# Altium PCB miaow-foc-board.pcbdoc (part 8 of 10)
Units mil, origin at the board's own origin, x right, y up, seen from the top; angles counter-clockwise.
Board outline 2755.91 x 3149.61 mil, 6 copper layers (SIG1, GND2, SIG3, PWR4, GND5, SIG6), stack 60.566 mil thick; 437 components, 392 nets, 2120 pads, 1697 vias.
Unrouted connection lines stored in the file: 1090.
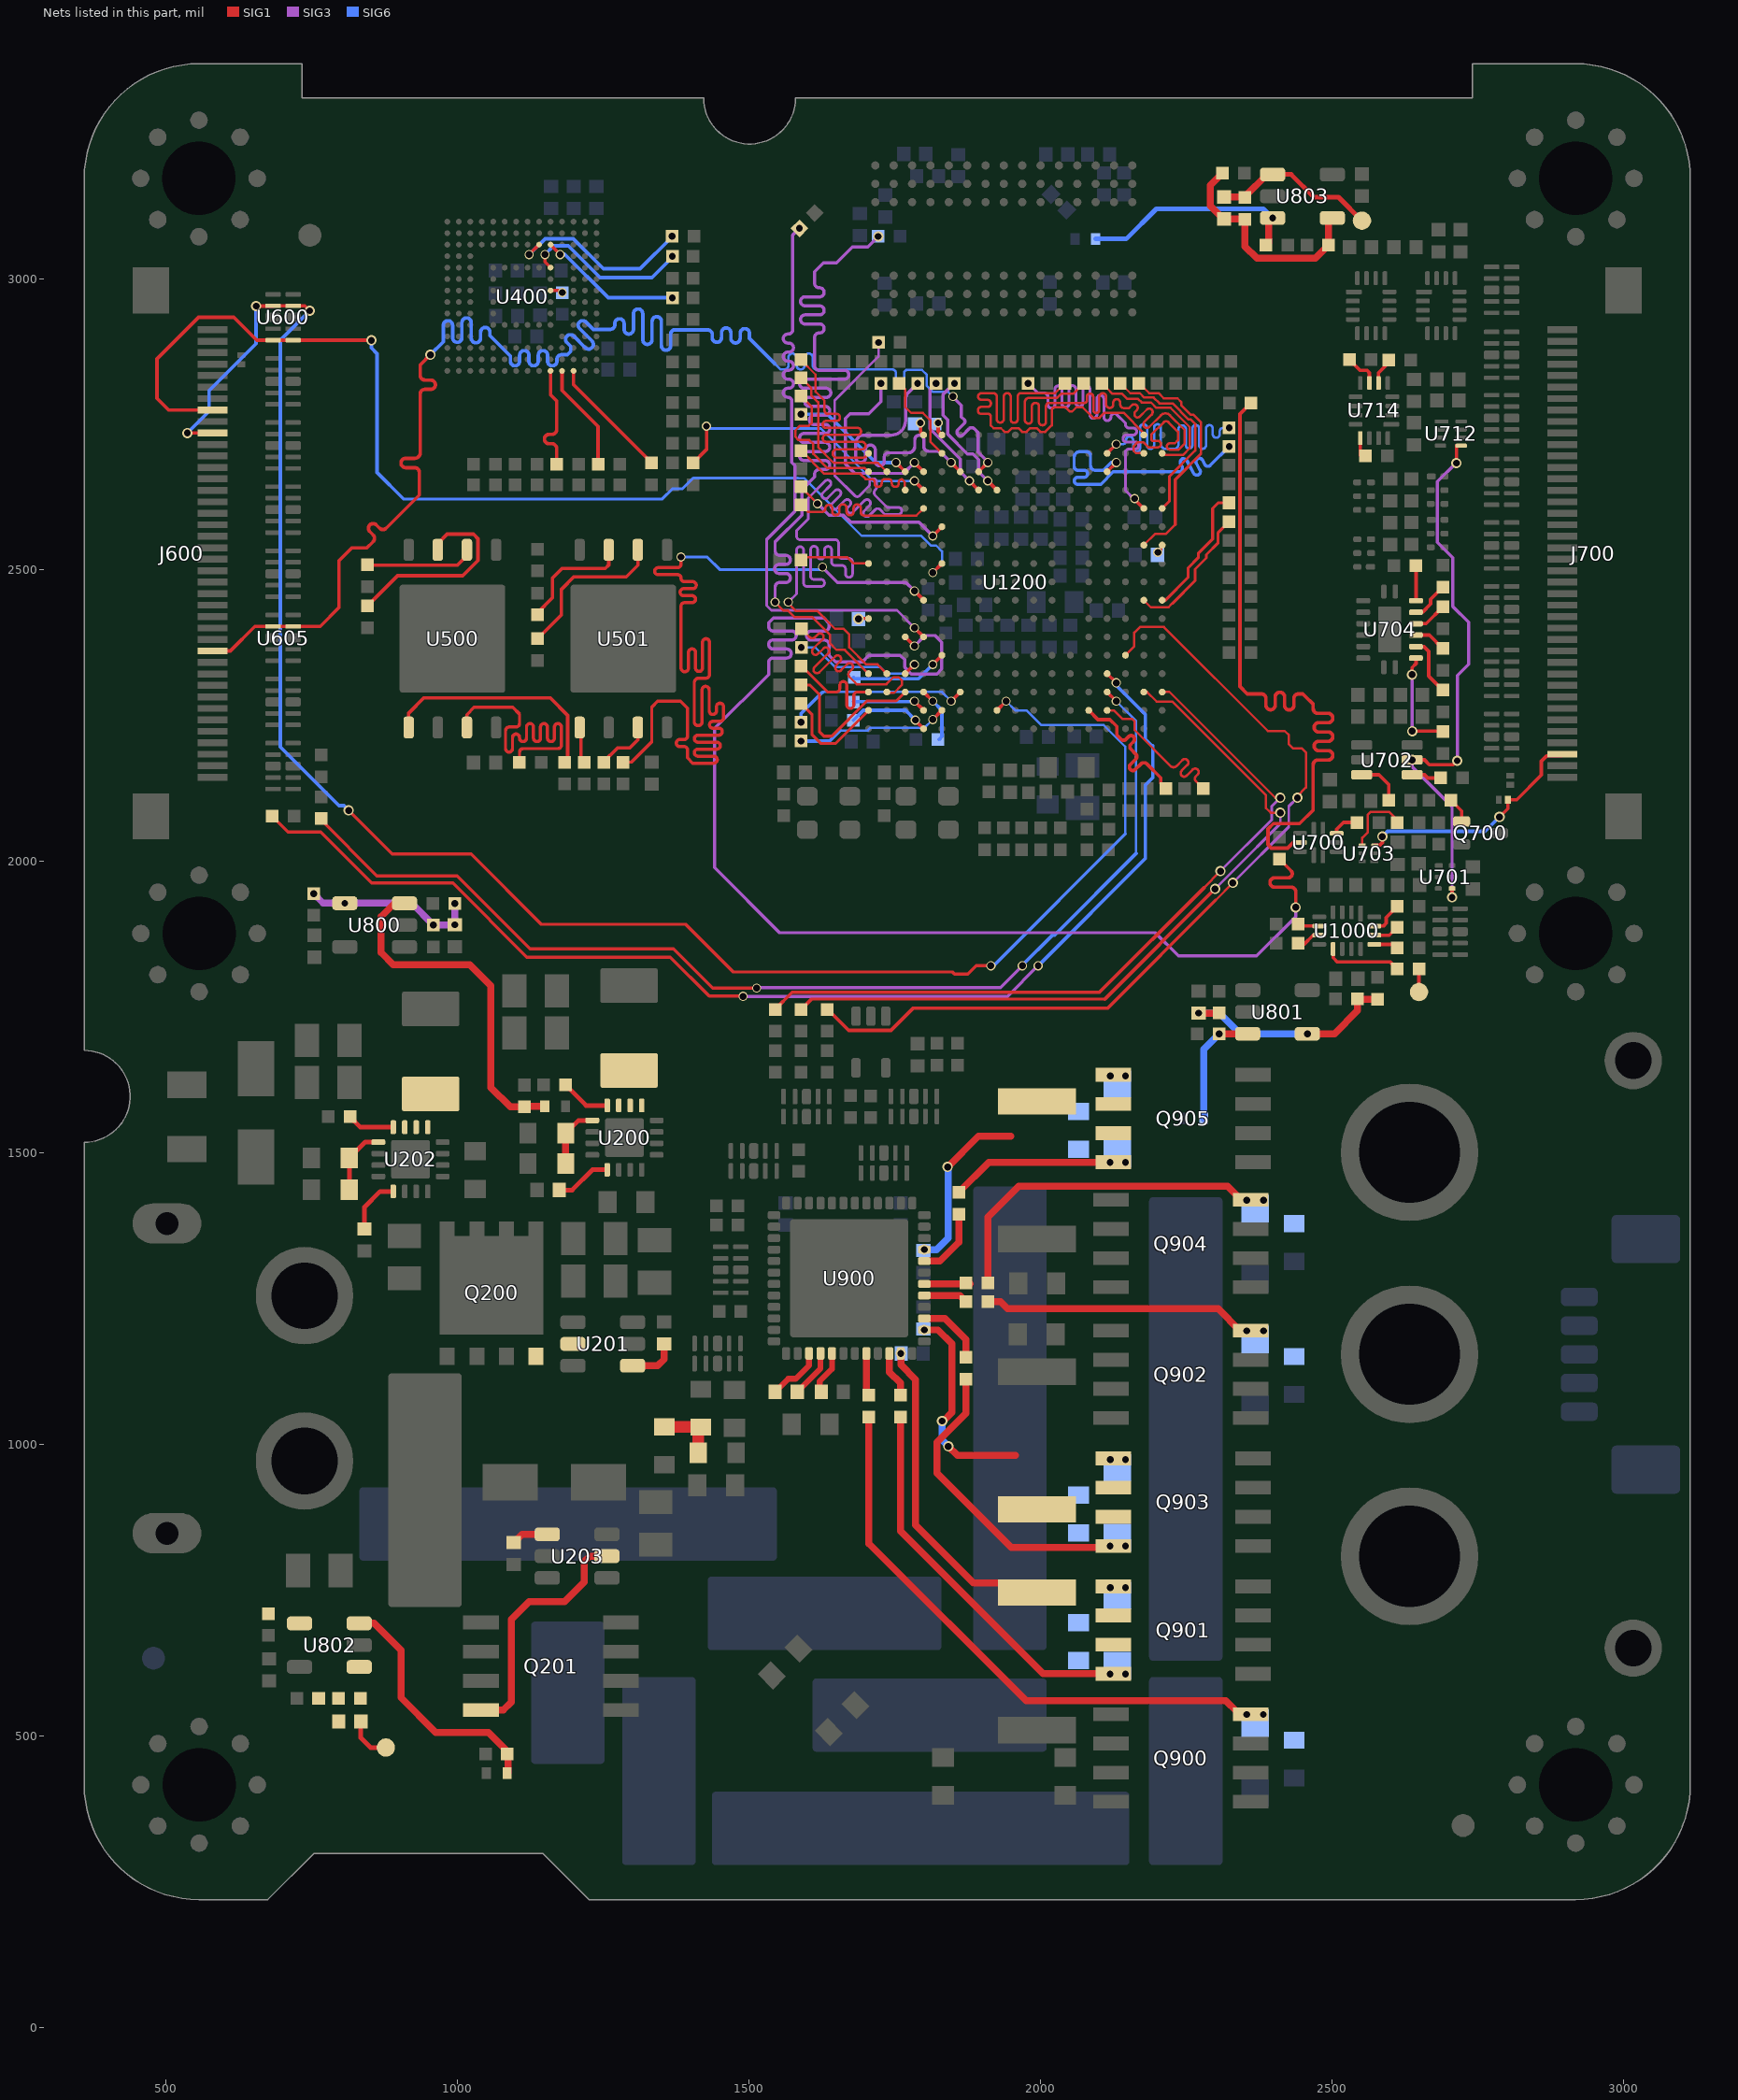
[diagram p11: the nets of this part, all layers, seen from the top]

## Via types
v1: diameter 17.72, hole 11.81, SIG1 to SIG6, tented both sides, 1223 vias
v2: diameter 15.75, hole 11.81, SIG1 to SIG6, tented both sides, 453 vias
v3: diameter 17.72, hole 11.81, SIG1 to SIG6, tented top, 21 vias

## Nets (pads, with @x,y where several pads share a name; then routed paths per layer and width w, separated by ;. In a path a pad name is that pad's centre, name@x,y a point inside that pad or via, vN(x,y) a via of type N, cw(c..) or ccw(c..) an arc to the next point about the centre after c; other vN are vias at no path point) (continued)
LCD_R7: J600.29 U605.2 U605.9 U1200.G15 | length 2909.1
  SIG1 w6: J600.29@579.29,2361.2 609.91,2361.2 652.12,2403.42 U605.2@683.32,2403.42 U605.9@717.77,2403.42 764.26,2403.42 796.24,2435.4 796.24,2515.51 819,2538.27 844.62,2538.27 854.94,2548.59 ccw(c848.96,2554.56) 854.94,2560.54 849.32,2566.16 cw(c854.98,2571.81) 860.63,2577.48 866.25,2571.86 ccw(c871.91,2577.51) 877.56,2571.86 934.37,2628.66 934.37,2667.62 ccw(c926.27,2667.62) 926.27,2675.72 910.97,2675.72 cw(c910.97,2683.72) 910.97,2691.72 926.27,2691.72 ccw(c926.27,2701.45) 936,2701.45 936,2802.22 cw(c943.83,2802.22) 943.83,2810.05 953.92,2810.05 ccw(c953.92,2818.05) 953.92,2826.05 943.83,2826.05 cw(c943.83,2834.05) 935.83,2834.05 935.83,2851.92 v1(953.31,2869.4) ; U1200.G15@1894.07,2668.8 v2(1909.82,2684.55)
  SIG3 w5.5: v2@1850.16,2797.24 1864.63,2782.76 1864.63,2762.88 1869.07,2758.44 cw(c1865.39,2754.76) 1869.07,2751.08 1858.72,2740.74 ccw(c1862.94,2736.48) 1867.21,2732.25 1877.55,2742.6 cw(c1882.08,2738.07) 1886.61,2742.6 1893.47,2735.74 1893.47,2702.64 1903.07,2693.04 1903.07,2692.94 1909.82,2686.2 v2(1909.82,2684.55)
  SIG6 w4: 1544.18,2854.53 1554.59,2844.11 1560.63,2844.11 ccw(c1560.63,2851.11) 1567.63,2851.11 1567.63,2864.49 cw(c1574.63,2864.49) 1581.63,2864.49 1581.63,2851.29 ccw(c1588.63,2851.29) 1595.63,2851.29 1595.63,2864.49 cw(c1602.63,2864.49) 1609.63,2864.49 1609.63,2851.11 ccw(c1616.63,2851.11) 1616.63,2844.11 1746.14,2844.11 cw(c1746.14,2837.97) 1752.28,2837.97 1752.28,2823.78 ccw(c1759.28,2823.78) 1766.28,2823.78 1766.28,2837.97 cw(c1771.75,2837.97) 1771.75,2843.44 1796.94,2843.44 1805.11,2835.28 1805.11,2815.99 1815.53,2805.57 1841.82,2805.57 v2@1850.16,2797.24
  SIG6 w6: v1(953.31,2869.4) 975.47,2891.56 975.47,2919.78 cw(c983.47,2919.78) 991.47,2919.78 991.47,2898.75 ccw(c999.47,2898.75) 1007.47,2898.75 1007.47,2924.6 cw(c1015.47,2924.6) 1023.47,2924.6 1023.47,2897.95 ccw(c1031.47,2897.95) 1039.47,2897.95 1039.47,2908.25 cw(c1047.47,2908.25) 1055.47,2908.25 1055.47,2902.59 1090.47,2867.59 1090.47,2858.52 ccw(c1098.47,2858.52) 1106.47,2858.52 1106.47,2868.54 cw(c1114.47,2868.54) 1122.47,2868.54 1122.47,2858.52 ccw(c1130.47,2858.52) 1138.47,2858.52 1138.47,2868.54 cw(c1146.47,2868.54) 1154.47,2868.54 1154.47,2858.52 ccw(c1162.47,2858.52) 1170.47,2858.52 1170.47,2861.4 cw(c1178.47,2861.4) 1178.47,2869.4 1188.53,2869.4 1194.09,2874.96 1194.09,2883.86 1187.75,2890.21 cw(c1193.41,2895.86) 1199.06,2901.52 1218.99,2881.59 ccw(c1224.81,2887.36) 1230.58,2893.18 1209.21,2914.54 cw(c1214.73,2920.06) 1220.25,2925.58 1232.81,2913.02 1261.75,2913.02 ccw(c1261.75,2921.02) 1269.75,2921.02 1269.75,2923.07 cw(c1277.75,2923.07) 1285.75,2923.07 1285.75,2912.99 ccw(c1293.75,2912.99) 1301.75,2912.99 1301.75,2939.91 cw(c1309.75,2939.91) 1317.75,2939.91 1317.75,2895.26 ccw(c1325.75,2895.26) 1333.75,2895.26 1333.75,2926.88 cw(c1341.75,2926.88) 1349.75,2926.88 1349.75,2885.17 ccw(c1357.75,2885.17) 1365.75,2885.17 1365.75,2905.02 cw(c1372.97,2905.02) 1372.97,2912.24 1428.89,2912.24 cw(c1428.89,2904.24) 1436.89,2904.24 1436.89,2898.83 ccw(c1444.89,2898.83) 1452.89,2898.83 1452.89,2907.46 cw(c1460.89,2907.46) 1468.89,2907.46 1468.89,2897.61 ccw(c1476.89,2897.61) 1484.89,2897.61 1484.89,2906.25 cw(c1492.89,2906.25) 1500.89,2906.25 1500.89,2897.82 1544.18,2854.53
  other v2: 1850.16,2797.74
LCD_RST: J600.8 U600.1 U600.10 U1200.E10 | length 1936.1
  SIG1 w6: J600.8@579.29,2774.58 504.28,2774.58 484.11,2794.76 484.11,2862.29 555.55,2933.73 615.95,2933.73 655.32,2894.36 U600.10@683.32,2894.36 U600.1@717.77,2894.36 852.07,2894.36 v1(852.12,2894.3) ; v2(1815.33,2495.57) U1200.E10@1831.08,2511.32
  SIG6 w4: 1583.84,2657.83 1594.4,2657.83 1693.56,2558.67 1795.54,2558.67 1812.02,2542.19 1821.03,2542.19 1831.08,2532.15 1831.08,2511.32 v2(1815.33,2495.57)
  SIG6 w5: 907.19,2622.14 1351.26,2622.14 1368.65,2639.53 1385.92,2639.53 1404.22,2657.83 1583.84,2657.83
  SIG6 w6: v1(852.12,2894.3) 852.12,2881.15 861.97,2871.3 861.97,2667.36 907.19,2622.14
LCD_SCL: R601.2 U1200.P3 | length 1916.1
  SIG1 w5.5: R601.2@765.64,2073.6 765.64,2071.17 861.39,1975.43 999.38,1975.43 1124.66,1850.15 1370.64,1850.15 1437.84,1782.95 v2@1513.12,1782.95
  SIG1 w6: U1200.P3@2114.54,2290.85 v2(2130.29,2275.1)
  SIG3 w5.5: v2@1513.25,1783.81 1513.58,1783.48 1931.42,1783.48 v2(1969.03,1821.1)
  SIG6 w4: v2(2130.29,2275.1) 2164.46,2240.93 2164.46,2013.96
  SIG6 w6: v2@1968.41,1819.51 1968.41,1821.55 2020.16,1873.3 2023.8,1873.3 2164.46,2013.96
  other v2: 1513.25,1782.81
LCD_SDA: R602.2 U1200.P4 | length 2080.2
  SIG1 w5.5: R602.2@682,2077.88 709.09,2050.79 764.96,2050.79 852.81,1962.94 992.19,1962.94 1119.04,1836.1 1365.12,1836.1 1431.77,1769.45 1488.58,1769.45 1489.53,1770.4 v2@1489.82,1770.11
  SIG1 w6: U1200.P4@2114.54,2322.34 v2(2130.29,2306.59)
  SIG3 w5.5: v2@1489.82,1770.11 1490.12,1770.4 1491.85,1768.66 1943.64,1768.66 v2(1996.07,1821.1)
  SIG6 w4: v2@2130.29,2302.19 v2(2130.29,2306.59) ; 2180.06,2211.66 2193,2198.72
  SIG6 w6: v2(1996.07,1821.1) 2180.12,2005.14 2180.12,2131.16 2193,2144.04 2193,2198.72 ; v2@2130.29,2302.19 2180.06,2252.42 2180.06,2211.66
  other v2: 1489.82,1768.61
LCD_VSYNC: J600.10 U600.4 U600.7 U1200.H2 | length 3284.5
  SIG1 w5.5: 819.93,2081.01 888.06,2012.88 1023.04,2012.88 1143.61,1892.31 1391.28,1892.31 1473.06,1810.52 1849.16,1810.52 1852.72,1806.97 1875.52,1806.97 1889.64,1821.1 v2(1914.96,1821.1)
  SIG1 w6: v1@536.2,2735.21 J600.10@579.29,2735.21 ; v1(654.33,2953.04) U600.7@682.95,2953.04 ; U600.7@683.32,2953.42 U600.4@717.77,2953.42 737.99,2953.42 v1(746.42,2944.99) ; U1200.H2@1925.56,2259.35 v2(1941.31,2275.1)
  SIG6 w4: v2(1941.31,2275.1) 1957.06,2259.35 1976.34,2259.35 2001.71,2233.99 2108.82,2233.99 2145.68,2197.13 2145.68,2047.33
  SIG6 w6: v1(536.19,2735.21) 573.71,2772.73 573.71,2807.81 654.33,2888.44 v1(654.33,2953.04) ; v1(746.42,2944.99) 695.83,2894.39 695.83,2196.41 796.31,2095.93 805.01,2095.93 v1(813.16,2087.78) ; v2(1914.96,1821.1) 1919.44,1821.1 2145.68,2047.33
NEN: U701.4 U702.5 U712.5 | length 946.2
  SIG1 w6: v1(2637.97,2174.38) 2659.09,2174.38 2667.4,2166.07 2708.58,2166.07 v1(2715.37,2172.86) ; v1(2706.43,1938.62) U701.4@2706.46,1953.75 ; v1@2713.83,2684.53 2714.03,2684.74 U712.5@2714.03,2713.5
  SIG3 w5.5: v1(2637.97,2174.38) 2638.01,2174.35 2638.01,2162.52 2706.43,2094.1 v1(2706.43,1938.62) ; v1@2713.04,2683.63 2681.19,2651.77 2681.19,2547.83 2707.81,2521.21 2707.81,2437.46 2734.63,2410.64 2734.63,2338.37 2715.37,2319.11 v1@2715.37,2172.72
  other v1: 2713.79,2683.63
NetC206_2: C206.2 U200.9 | length 96.9
  SIG1 w8: C206.2@1174.34,1436.42 1196.65,1436.42 1231.43,1471.21 U200.9@1256.82,1471.21
NetC207_2: C207.2 U201.1 | length 84.9
  SIG1 w12: U201.1@1300.28,1135.01 1343.4,1135.01 1354.36,1145.97 C207.2@1354.36,1172.25
NetC212_2: C212.2 U203.1 | length 63.4
  SIG1 w12: C212.2@1096.37,831.67 1110.48,845.79 U203.1@1153.91,845.79
NetC215_2: C215.2 U202.9 | length 98.2
  SIG1 w8: C215.2@840.08,1369.53 840.08,1406.97 867.1,1433.99 U202.9@889.65,1433.99
NetC800_2: C800.2 R800.2 R801.2 R804.2 U800.4 | length 301.2
  SIG3 w12: v1(752.87,1945.11) 769.57,1928.41 v1(806.48,1928.41) 921.28,1928.41 v1(958.64,1891.04) 994.75,1891.04 v1(995.25,1891.54) 995.32,1891.61 v1(995.32,1927.69)
NetC801_2: C801.2 R802.2 R803.2 R805.2 U801.4 | length 394.9
  SIG1 w12: v1(2271.7,1739.89) 2306.94,1739.89 R803.2@2307.14,1740.09 ; v1(2458.11,1704.47) 2504.66,1704.47 2544.24,1744.06 R802.2@2544.24,1764.72 2545.43,1763.53 R805.2@2578.91,1763.53
  SIG6 w12: v1(2271.7,1739.89) 2307.34,1739.89 2342.76,1704.47 v1(2458.11,1704.47)
NetC804_1: C804.1 R809.1 TP1301.0 U802.1 | length 77.9
  SIG1 w8: C804.1@834.02,524.74 834.02,496.54 850.56,480 TP1301.0@876.87,480
NetC804_2: C804.2 R808.2 R809.2 R812.2 U802.4
NetC805_1: C805.1 R811.1 TP1302.0 U803.1 | length 287.4
  SIG1 w8: U803.1@2398.57,3178.77 2430.48,3178.77 2469.56,3139.69 2511.56,3139.69 TP1302.0@2551.82,3099.42
  SIG1 w12: C805.1@2315.17,3140.14 2350.21,3140.14 R811.1@2351.19,3139.15 2351.19,3140.93 2389.03,3178.77 U803.1@2398.57,3178.77
NetC805_2: C805.2 R810.2 R811.2 R813.2 U803.4 | length 390.8
  SIG1 w12: R810.2@2312.42,3180.7 2291.85,3160.13 2291.85,3124.76 C805.2@2315.4,3101.21 ; C805.2@2315.17,3102.34 2350.6,3102.34 R811.2@2351.19,3101.75 ; R811.2@2350.99,3101.55 2350.99,3055.49 2371.65,3034.84 2472.2,3034.84 R813.2@2494.76,3057.4 ; R813.2@2494.54,3057.62 2494.54,3097.58 U803.4@2500.93,3103.96
NetC903_1: C903.1 U900.5 | length 74.5
  SIG1 w10: C903.1@1621.52,1090.27 1621.52,1108.45 1642.44,1129.37 U900.5@1642.44,1156.1
NetC905_1: C905.1 U900.3 | length 97.5
  SIG1 w10: C905.1@1544.96,1090.09 1567.41,1112.53 1580.14,1112.53 1603.07,1135.46 U900.3@1603.07,1156.1
NetC905_2: C905.2 U900.4 | length 82.4
  SIG1 w10: C905.2@1582.66,1090.27 1622.76,1130.36 U900.4@1622.76,1156.1
NetC909_2: C909.2 D901.1 Q901.1 Q901.2 Q901.3 R907.1 R918.2 U900.11 | length 501.2
  SIG1 w12: v1(1760.55,1156.1) 1760.55,1136.63 1785.89,1111.29 1785.89,861.71 1885.28,762.32 R918.2@1941.04,762.32
  other v1: 2120.15,754.45 2146.19,754.45
NetC910_2: C910.2 D903.1 Q903.1 Q903.2 Q903.3 R915.1 R926.2 U900.14 | length 368.1
  SIG1 w12: v1(1800.91,1196.45) 1824.47,1196.45 1848.43,1172.49 1848.43,1054.96 1833.6,1040.12 v1(1831.4,1040.12) ; v1(1842.08,996.61) 1857.62,981.07 1957.67,981.07
  SIG6 w12: v1(1831.4,1040.12) 1831.4,1007.69 1837.62,1001.47 1842.08,997.01 v1(1842.08,996.61)
  other v1: 2120.15,973.86 2146.19,973.86
NetC911_2: C911.2 D905.1 Q905.1 Q905.2 Q905.3 R925.1 R927.2 U900.21 | length 301.3
  SIG1 w12: v1(1840.96,1475.88) 1893.59,1528.51 1949.42,1528.51
  SIG6 w12: v1(1800.91,1334.25) 1821.89,1334.25 1841.62,1353.98 1841.62,1475.23 v1(1840.96,1475.88)
  other v1: 2120.15,1632.07 2146.19,1632.07
NetC1222_2: C1222.2 U1200.U11 | length 17
  SIG1 w4: v2(2201.58,2530.38) v2(2201.58,2530.38) 2204.06,2530.47 2207.53,2533.94 2207.53,2541.32 U1200.U11@2209.03,2542.81
NetC1223_2: C1223.2 U1200.D17 | length 22.8
  SIG1 w6: v2@1794.75,2752.62 1794.75,2736.62 U1200.D17@1799.58,2731.79
  other v2: 1794.25,2752.62
NetC1229_2: C1229.2 U1200.A7 | length 17.4
  SIG1 w6: v1(1687.91,2416.23) 1688.51,2416.83 U1200.A7@1705.09,2416.83
NetD701_1: D701.1 J700.3 U703.3 | length 414.8
  SIG1 w6: U703.3@2573.99,2027.89 2582.04,2027.89 2586.85,2032.69 v1(2586.85,2042.83) ; v1(2787.81,2076.47) 2802.18,2090.85 D701.1@2802.18,2106.02 2817.42,2106.02 2859.69,2148.29 2859.69,2172.19 2868.64,2181.13 2892.43,2181.13 J700.3@2895.33,2184.03
  SIG6 w6: v1(2586.85,2042.83) 2595.71,2051.69 2763.03,2051.69 v1(2787.81,2076.47)
NetD900_2: D900.2 Q900.4 R900.2 R901.2 | length 969.1
  SIG1 w12: R900.2@1705.91,1047.18 1705.91,829.75 1975.41,560.25 2318.26,560.25 Q900.4@2337.81,540.7
  other v1: 2353.88,536.57 2382.49,536.57
NetD901_2: D901.2 Q901.4 R906.2 R907.2 | length 662.5
  SIG1 w12: R906.2@1759.77,1047.18 1759.77,851.54 2004.86,606.45 2119.57,606.45 Q901.4@2125.15,606.45
  other v1: 2119.57,605.97 2146.19,605.97
NetD902_2: D902.2 Q902.4 R909.2 R910.2 | length 464
  SIG1 w12: R909.2@1909.83,1244.81 1931.77,1244.81 1943.83,1232.74 2304.99,1232.74 2342.95,1194.78 Q902.4@2353.13,1194.78
  other v1: 2354.13,1194.78 2382.74,1194.78
NetD903_2: D903.2 Q903.4 R914.2 R915.2 | length 538
  SIG1 w12: R914.2@1872.32,1111.98 1872.32,1053.45 1822.68,1003.81 1822.68,950.72 1949.95,823.45 2122.74,823.45 Q903.4@2125.15,825.86
  other v1: 2119.57,825.38 2146.19,825.38
NetD904_2: D904.2 Q904.4 R920.2 R922.2 | length 579.5
  SIG1 w12: R920.2@1909.94,1277.2 1909.94,1389.73 1963.04,1442.83 2321.49,1442.83 Q904.4@2345.13,1419.19
  other v1: 2354.13,1419.19 2382.74,1419.19
NetD905_2: D905.2 Q905.4 R924.2 R925.2 | length 286.6
  SIG1 w12: R924.2@1859.92,1432.45 1911.55,1484.07 2119.57,1484.07 Q905.4@2125.15,1484.07
  other v1: 2119.57,1483.59 2146.19,1483.59
NetL200_1: L200.1 U200.1 U200.2 U200.3
NetL201_1: L201.1 U202.1 U202.2 U202.3
NetQ200_4: Q200.4 U201.5
NetQ201_4: Q201.4 U203.5 | length 428.7
  SIG1 w12: Q201.4@1040.16,544.44 1078.27,544.44 1091.94,558.12 1091.94,699.46 1122.57,730.09 1183.45,730.09 1217.4,764.03 1217.4,798.9 1226.88,808.38 U203.5@1256.27,808.38
NetQ700_G: Q700.G R703.1 | length 44.2
  SIG1 w6: R703.1@2704.39,2105.18 2722.85,2086.73 Q700.G@2722.85,2068.66
NetR200_1: R200.1 U200.4 | length 86.2
  SIG1 w8: R200.1@1185.23,1616.72 1220.51,1581.44 U200.4@1256.82,1581.44
NetR201_1: R201.1 R203.2 U200.5 | length 106.5
  SIG1 w8: R203.2@1185.63,1533.94 1207.53,1555.85 U200.5@1231.23,1555.85
  SIG1 w12: R201.1@1185.63,1482.11 R203.2@1185.63,1533.94
NetR204_1: R204.1 U202.4 | length 81.7
  SIG1 w8: R204.1@815.35,1562.07 833.19,1544.23 U202.4@889.65,1544.23
NetR205_1: R205.1 R206.2 U202.5 | length 115.5
  SIG1 w8: R205.1@814.11,1437.09 R206.2@814.11,1491.29 841.45,1518.64 U202.5@864.06,1518.64
NetR401_2: R401.2 U400.A3 | length 213.4
  SIG1 w6: U400.A3@1198.93,2841.82 1198.93,2818.12 R401.2@1333.04,2684.01
NetR403_2: R403.2 U400.A4 | length 185.8
  SIG1 w6: U400.A4@1179.25,2841.82 1179.25,2808.29 1241.15,2746.39 R403.2@1241.15,2681.61
NetR405_2: R405.2 U400.A5 | length 192.7
  SIG1 w6: U400.A5@1159.56,2841.82 1159.56,2800.8 1169.96,2790.41 1169.96,2774.49 1169.96,2740.78 cw(c1161.96,2740.78) 1161.96,2732.78 1156.98,2732.78 ccw(c1156.98,2724.78) 1156.98,2716.78 1161.96,2716.78 cw(c1161.96,2708.78) 1169.96,2708.78 1169.96,2705.78 R405.2@1169.96,2681.61
NetR417_2: R417.2 U400.M5 | length 247.3
  SIG1 w6: U400.M5@1159.56,3058.36 1159.56,3057.84 v2(1176.04,3041.37)
  SIG6 w6: v2@1176.04,3042.04 1183.59,3042.04 1258.39,2967.23 v1(1368.5,2967.23)
NetR418_2: R418.2 U400.M6 | length 325.6
  SIG1 w6: v2(1122.67,3041.37) 1122.89,3041.37 U400.M6@1139.88,3058.36
  SIG6 w6: v2(1122.67,3041.37) 1123.28,3041.37 1150.47,3068.56 1198.6,3068.56 1250.16,3017 1313.22,3017 1367.94,3071.71 v1(1367.94,3072.53)
NetR419_2: R419.2 U400.H5 | length 21.5
  SIG1 w6: U400.H5@1159.56,2979.62 1176.2,2979.62 v2(1179.67,2976.14)
NetR421_2: R421.2 U400.K5 | length 288.5
  SIG1 w6: v2@1149.85,3042.37 1149.85,3028.7 U400.K5@1159.56,3018.99
  SIG6 w6: v2(1149.85,3041.37) 1164.73,3056.25 1190.15,3056.25 1244.68,3001.71 1333.51,3001.71 v1@1367.91,3036.11
  other v1: 1368.5,3038.32
NetR501_2: R501.2 U500.5 | length 412.7
  SIG1 w6: U500.5@916.1,2223.39 916.1,2254.57 942.46,2280.93 1158.85,2280.93 1189.03,2250.76 R501.2@1189.03,2165.59
NetR502_2: R502.2 U501.5 | length 62.7
  SIG1 w6: U501.5@1209.36,2229.98 1211.65,2227.69 1211.65,2175.89 R502.2@1217.05,2170.49
NetR503_2: R503.2 U500.2 | length 179.3
  SIG1 w6: R503.2@845.15,2509.32 845.94,2508.53 999.74,2508.53 U500.2@1016.95,2525.73
NetR504_2: R504.2 U501.2 | length 276.2
  SIG1 w6: R504.2@1137.38,2382.55 1178.23,2423.4 1178.23,2467.27 1199.48,2488.52 1289.63,2488.52 1309.36,2508.25 U501.2@1309.36,2534.7
NetR505_2: R505.2 U500.3 | length 349.8
  SIG1 w6: R505.2@845.15,2438.35 897.03,2490.24 1008.87,2490.24 1035.08,2516.44 1035.08,2553.77 1027.31,2561.53 982.22,2561.53 966.46,2545.77 U500.3@966.46,2533.92
NetR506_2: R506.2 U501.3 | length 201.6
  SIG1 w6: R506.2@1137.38,2427.04 1162.95,2452.61 1162.95,2486.54 1179.37,2502.96 1253.45,2502.96 1259.36,2508.87 U501.3@1259.36,2534.7
NetR507_2: R507.2 U500.7 | length 602.7
  SIG1 w5.5: U500.7@1016.1,2226.25 1016.1,2252.2 1028.39,2264.5 1094.87,2264.5 1106.29,2253.08 1106.29,2238.73 1106.29,2236.73 cw(c1100.29,2236.73) 1100.29,2230.73 1088.29,2230.73 ccw(c1088.29,2224.73) 1082.29,2224.73 1082.29,2193.74 ccw(c1088.29,2193.74) 1094.29,2193.74 1094.29,2212.73 cw(c1100.29,2212.73) 1106.29,2212.73 1106.29,2211.74 ccw(c1112.29,2211.74) 1118.29,2211.74 1118.29,2230.73 cw(c1124.29,2230.73) 1130.29,2230.73 1130.29,2211.74 ccw(c1136.29,2211.74) 1142.29,2211.74 1142.29,2230.73 cw(c1148.29,2230.73) 1148.29,2236.73 cw(c1148.29,2230.73) 1154.29,2230.73 1154.29,2211.74 ccw(c1160.29,2211.74) 1160.29,2205.74 ccw(c1160.29,2211.74) 1166.29,2211.74 1166.29,2230.73 cw(c1172.29,2230.73) 1172.29,2236.73 cw(c1172.29,2230.73) 1178.29,2230.73 1178.29,2199.74 cw(c1172.29,2199.74) 1172.29,2193.74 1112.29,2193.74 ccw(c1112.29,2187.74) 1106.29,2187.74 1106.29,2185.74 R507.2@1106.29,2164.73
NetR508_2: R508.2 U501.7 | length 96.2
  SIG1 w6: R508.2@1250.63,2170.49 1250.63,2171.25 1274.47,2195.09 1295.62,2195.09 1309.36,2208.84 U501.7@1309.36,2229.98
NetR701_1: R701.1 U700.5 | length 46.7
  SIG1 w6: U700.5@2508.45,2048.36 2508.45,2055.3 2520.19,2067.05 R701.1@2543.34,2067.05
NetR702_2: R702.2 U700.9 | length 1235.2
  SIG1 w6: R702.2@2361.47,2786.8 2342.34,2767.67 2342.34,2300.31 2354.94,2287.71 2359.3,2287.71 2379.02,2287.71 cw(c2379.02,2279.71) 2387.02,2279.71 2387.02,2268.39 ccw(c2395.02,2268.39) 2403.02,2268.39 2403.02,2282.39 cw(c2411.02,2282.39) 2419.02,2282.39 2419.02,2268.08 ccw(c2427.02,2268.08) 2435.02,2268.08 2435.02,2279.71 cw(c2443.02,2279.71) 2443.02,2287.71 2450.35,2287.71 2454.02,2284.04 2468.14,2269.92 2468.14,2262.23 ccw(c2476.14,2262.23) 2476.14,2254.23 2493.74,2254.23 cw(c2493.74,2246.23) 2493.74,2238.23 2477.75,2238.23 ccw(c2477.75,2230.23) 2477.75,2222.23 2493.74,2222.23 cw(c2493.74,2214.23) 2493.74,2206.23 2477.75,2206.23 ccw(c2477.75,2198.23) 2477.75,2190.23 2493.74,2190.23 cw(c2493.74,2182.23) 2493.74,2174.23 2476.14,2174.23 ccw(c2476.14,2166.23) 2468.14,2166.23 2468.14,2088.3 2444.79,2064.94 2399.76,2064.94 2390.49,2055.67 2390.49,2029 2396.36,2023.12 2424.36,2023.12 2433.77,2032.54 U700.9@2445.38,2032.54
NetR704_2: R704.2 U702.3 | length 80.2
  SIG1 w6: U702.3@2551.36,2148.79 2580.91,2148.79 2597.82,2131.89 R704.2@2597.82,2105.18
NetR705_1: R705.1 U702.4 | length 51.3
  SIG1 w6: U702.4@2637.97,2148.79 2659.06,2148.79 2664.56,2143.3 R705.1@2686.99,2143.3
NetR706_2: R706.2 U703.4 | length 119.4
  SIG1 w4: U703.4@2552.34,2027.89 2552.34,2040.66 2561.37,2049.7 2561.37,2080.06 2566.8,2085.48 2598.26,2085.48 2612.43,2071.32 R706.2@2612.43,2067.05
NetR707_1: R707.1 U704.2 | length 181.8
  SIG1 w6: v1@2637.62,2223.8 2689.47,2223.8 R707.1@2690.64,2222.62 ; v1(2637.76,2320.76) 2637.76,2332.84 2644.56,2339.64 U704.2@2644.56,2349.03
  SIG3 w4: v1(2637.76,2320.76) v1@2637.97,2320.54
  SIG3 w5.5: v1(2637.97,2223.63) v1@2637.97,2320.54
NetR708_1: R708.1 U704.3 | length 101.8
  SIG1 w6: U704.3@2644.56,2368.72 2658.2,2368.72 2666.4,2360.52 2666.4,2318.23 R708.1@2690.64,2293.98
NetR709_1: R709.1 U704.4 | length 55.6
  SIG1 w6: U704.4@2644.56,2388.4 2667.58,2388.4 R709.1@2690.64,2365.34
NetR710_1: R710.1 U704.5 | length 57.9
  SIG1 w6: U704.5@2644.56,2408.09 2662.03,2408.09 R710.1@2690.64,2436.7
NetR711_1: R711.1 U704.6 | length 68.5
  SIG1 w6: U704.6@2644.56,2427.77 2655.76,2427.77 2669.73,2441.75 2669.73,2449.75 R711.1@2690.64,2470.66
NetR712_1: R712.1 U704.7 | length 60.2
  SIG1 w6: R712.1@2644.23,2507.49 2644.56,2507.17 U704.7@2644.56,2447.46
NetR713_2: R713.2 U714.6 | length 46.7
  SIG1 w6: U714.6@2580.37,2820.93 2580.37,2838.56 2598.12,2856.3 R713.2@2598.12,2860.23
NetR714_2: R714.2 U714.7 | length 61.1
  SIG1 w6: R714.2@2530.31,2860.8 2548.5,2842.61 2560.48,2842.61 2564.63,2838.46 U714.7@2564.63,2820.93
NetR715_1: R715.1 U714.13 | length 29.7
  SIG1 w6: R715.1@2548.88,2696.75 U714.13@2548.88,2726.44
NetR806_2: R806.2 RT800.1 U800.3 | length 604.3
  SIG1 w12: U800.3@908.85,1928.41 891.62,1928.41 868.98,1905.76 868.98,1843.87 889.68,1823.17 1020.92,1823.17 1057.24,1786.85 1057.24,1612.25 1090.36,1579.13 R806.2@1114.44,1579.13 1115.33,1580.02 RT800.1@1149.81,1580.02
NetR807_2: R807.2 RT801.1 U801.3 | length 205.9
  SIG1 w12: R807.2@2306.82,1702.28 2309.02,1704.47 U801.3@2355.75,1704.47
  SIG6 w12: RT801.1@2280.49,1559.07 2280.49,1677.95 v1(2306.82,1704.28)
NetR814_2: R814.2 RT802.1 U802.3 | length 429.4
  SIG1 w12: U802.3@831.27,693.08 856.45,693.08 902.99,646.54 902.99,565.53 962.64,505.88 1052.98,505.88 ; 1053.2,505.88 1086.77,472.31 RT802.1@1086.77,437.07
NetR815_2: R815.2 RT803.1 U803.3 | length 382.9
  SIG1 w12: R815.2@2387.34,3057.4 2391.45,3061.51 2391.45,3096.85 v1(2398.57,3103.96)
  SIG6 w8: RT803.1@2094.89,3068 2147.2,3068 2198.98,3119.79 2382.74,3119.79 v1(2398.57,3103.96)
NetR900_1: R900.1 U900.8 | length 69.6
  SIG1 w12: R900.1@1701.45,1086.5 U900.8@1701.45,1156.06
NetR906_1: R906.1 U900.10 | length 79.3
  SIG1 w12: U900.10@1740.87,1156.1 1740.87,1124.14 1759.77,1105.23 R906.1@1759.77,1084.58
NetR909_1: R909.1 U900.17 | length 76
  SIG1 w12: U900.17@1800.91,1255.51 1861.73,1255.51 R909.1@1872.43,1244.81
NetR914_1: R914.1 U900.15 | length 116.9
  SIG1 w12: U900.15@1800.91,1216.14 1836.04,1216.14 1872.32,1179.86 R914.1@1872.32,1149.38
NetR920_1: R920.1 U900.18 | length 79
  SIG1 w12: U900.18@1800.91,1275.19 R920.1@1879.87,1275.19
NetR921_2: R921.2 R923.2 R928.1 | length 102.8
  SIG1 w20: R923.2@1355.07,1030.37 R928.1@1416.4,1030.37 ; R921.2@1413.08,985.54 R928.1@1413.08,1027.05
NetR924_1: R924.1 U900.20 | length 120.7
  SIG1 w12: U900.20@1800.91,1314.56 1827.81,1314.56 1859.92,1346.68 R924.1@1859.92,1395.04
NetR1000_2: R1000.2 U1000.6 | length 43.3
  SIG1 w6: R1000.2@2437.29,1893.88 2441.85,1889.32 U1000.6@2478.65,1889.32
NetR1001_1: R1001.1 U1000.15 | length 58.8
  SIG1 w6: U1000.15@2573.14,1889.32 2588.46,1889.32 2593.43,1894.29 2593.43,1903.94 R1001.1@2612.36,1922.86
NetR1002_2: R1002.2 U1000.7 | length 47.9
  SIG1 w6: R1002.2@2437.29,1857.69 2437.65,1858.05 2452.4,1858.05 2467.91,1873.57 U1000.7@2478.65,1873.57
NetR1003_1: R1003.1 U1000.14 | length 44.9
  SIG1 w6: U1000.14@2573.14,1873.57 2598.63,1873.57 R1003.1@2612.36,1887.3
NetR1004_1: R1004.1 TP1300.0 | length 39.9
  SIG1 w4: R1004.1@2649.76,1816.06 R1004.1@2649.76,1816.06
  SIG1 w6: TP1300.0@2649.71,1776.15 R1004.1@2649.76,1816.06
NetR1004_2: R1004.2 U1000.9 | length 132.8
  SIG1 w6: U1000.9@2502.28,1849.95 2502.28,1835.13 2509.8,1827.6 2600.81,1827.6 R1004.2@2612.36,1816.06
NetR1005_1: R1005.1 U1000.13 | length 41.7
  SIG1 w6: U1000.13@2573.14,1857.82 2606.27,1857.82 R1005.1@2612.36,1851.74
NetR1300_1: R1300.1 U1200.D13 | length 293.8
  SIG1 w4: R1300.1@1589.45,2611.6 1601.22,2599.83 1625.03,2599.83 ccw(c1625.03,2605.83) 1631.03,2605.83 ; 1631.03,2605.94 cw(c1637.03,2605.94) 1643.03,2605.94 1643.03,2600.39 ccw(c1649.03,2600.39) 1655.03,2600.39 1655.03,2606.8 cw(c1661.25,2606.8) 1667.47,2606.8 1667.47,2599.87 ccw(c1673.47,2599.87) 1679.47,2599.87 1679.47,2606.28 cw(c1685.69,2606.28) 1691.92,2606.28 1691.92,2599.35 ccw(c1697.71,2599.35) 1697.71,2593.56 1787.33,2593.56 U1200.D13@1799.58,2605.81
NetR1301_1: R1301.1 U1200.T8 | length 237.6
  SIG1 w4: U1200.T8@2177.53,2448.33 2189.58,2436.28 2220.03,2436.28 2226.55,2442.8
  SIG1 w5: 2226.55,2442.8 2265.58,2481.83 2265.58,2501.51 2284.85,2520.78 2284.85,2526.55 2305.07,2546.77 2305.07,2564.32 R1301.1@2324.05,2583.31
NetR1302_1: R1302.1 U1200.A16 | length 534.4
  SIG1 w4: R1302.1@1589.45,2860.81 1589.45,2860.25 1614.18,2835.51 1614.18,2806.08 1629.59,2790.68 1629.59,2774.02 ccw(c1635.59,2774.02) 1635.59,2768.02 1650.25,2768.02 cw(c1650.25,2762.02) 1650.25,2756.02 1632.46,2756.02 ccw(c1632.46,2750.02) 1632.46,2744.02 1686.48,2744.02 cw(c1686.48,2738.02) 1686.48,2732.02 1632.46,2732.02 ccw(c1632.46,2726.02) 1632.46,2720.02 1693.71,2720.02 cw(c1693.69,2713.56) 1693.71,2707.1 1650.66,2707.1 ccw(c1650.66,2699.97) 1650.47,2692.84 1695.83,2692.84 ccw(c1695.83,2700.29) 1703.29,2700.29 U1200.A16@1705.09,2700.29
NetR1303_1: R1303.1 U1200.E12 | length 283.4
  SIG1 w4: R1303.1@1589.45,2642.75 1589.45,2641.89 v2(1617.58,2613.74)
  SIG1 w6: v2(1815.33,2558.56) U1200.E12@1831.08,2574.31
  SIG3 w5.5: v2@1617.76,2613.92 1637.38,2594.29 1662.57,2594.29 1674.7,2582.16 1791.73,2582.16 v2(1815.33,2558.56)
NetR1304_1: R1304.1 U1200.U8 | length 229.1
  SIG1 w5: U1200.U8@2209.03,2448.33 2214.63,2448.33 2253.6,2487.3 2253.6,2503.75 2270.88,2521.04 2270.88,2528.63 2295.65,2553.4 2295.65,2605.73 2305.51,2615.59 2323.9,2615.59 R1304.1@2324.05,2615.44
NetR1305_1: R1305.1 U1200.A15 | length 258.6
  SIG1 w4: R1305.1@1589.45,2798.51 1607.88,2780.08 1607.88,2752.65 1602.79,2747.56 1587.54,2747.56 1579.3,2739.32 1579.3,2728.95 1585.17,2723.07 1603.44,2723.07 1610.33,2716.18 1610.33,2699.3 1634.78,2674.85 1698.64,2674.85 1704.69,2668.8 U1200.A15@1705.09,2668.8
NetR1306_1: R1306.1 U1200.B15 | length 266.4
  SIG1 w4: R1306.1@1589.45,2829.66 1606.63,2812.47 1606.63,2799.8 1618.59,2787.84 1618.59,2710.64 1645.46,2683.77 1721.62,2683.77 U1200.B15@1736.59,2668.8
NetR1307_1: R1307.1 U1200.C14 | length 247.5
  SIG1 w4: R1307.1@1589.45,2705.06 1629.24,2665.26 1691,2665.26 1700.03,2656.23 1709.64,2656.23 cw(c1709.65,2650.24) 1715.65,2650.24 1715.65,2648.71 ccw(c1721.65,2648.71) 1727.65,2648.71 1727.65,2650.23 cw(c1733.65,2650.23) 1733.65,2656.23 1739.15,2656.23 cw(c1739.16,2650.24) 1745.16,2650.24 1745.16,2648.71 ccw(c1751.16,2648.71) 1757.16,2648.71 cw(c1762.66,2650.1) 1762.66,2655.78 1767.46,2650.97 1767.46,2637.92 U1200.C14@1768.08,2637.3
NetR1308_1: R1308.1 U1200.U3 | length 1309.1
  SIG1 w4: U1200.U3@2209.03,2290.85 2209.56,2291.38 2221.09,2291.38 2403.08,2109.39 v1(2411.74,2109.39) ; 2280.61,1955 v1(2309.06,1983.45)
  SIG1 w5.5: 1574.24,1775.53 2101.14,1775.53
  SIG1 w6: R1308.1@1544.99,1746.28 1574.24,1775.53 ; 2101.14,1775.53 2280.61,1955
  SIG3 w4.5: v1(2309.06,1983.45) 2397.09,2071.48 2397.09,2094.74 v1(2411.74,2109.39)
NetR1309_1: R1309.1 U1200.H14 | length 235.7
  SIG1 w6: v2(1909.82,2653.05) U1200.H14@1925.56,2637.3
  SIG3 w5.5: v2(1852.65,2820.56) 1852.01,2820.56 1832.87,2801.42 1832.87,2766.01 1840.85,2758.04 1840.85,2733.24 1874.73,2699.36 1884.02,2699.36 1894.07,2689.31 1894.07,2668.8 v2(1909.82,2653.05)
NetR1310_1: R1310.1 U1200.A4 | length 1690.3
  SIG1 w4: v2(1544.81,2445.06) 1559.42,2430.46 1567.27,2430.46 1577.99,2419.74 1608.1,2419.74 1638.66,2389.18 1638.66,2374.69 1650.31,2363.04 1664.39,2363.04 U1200.A4@1705.09,2322.34
  SIG3 w5.5: v2(1544.81,2445.06) 1544.81,2471.03 cw(c1552.56,2471.03) 1552.56,2478.78 1563.3,2478.78 ccw(c1563.3,2486.53) 1563.3,2494.28 1551.67,2494.28 cw(c1551.67,2502.03) 1551.67,2509.78 1563.3,2509.78 ccw(c1563.3,2517.53) 1563.3,2525.28 1552.56,2525.28 cw(c1552.56,2533.03) 1544.81,2533.03 1544.81,2548.45 1590.84,2594.48 1590.84,2637.89 1612.56,2659.61 1612.56,2664.67 cw(c1620.31,2664.67) 1620.31,2672.42 1630.86,2672.42 ccw(c1630.86,2680.17) 1630.86,2687.92 1594.55,2687.92 cw(c1594.55,2695.67) 1594.55,2703.42 1630.86,2703.42 ccw(c1630.86,2711.17) 1630.86,2718.92 1594.55,2718.92 cw(c1594.55,2726.67) 1594.55,2734.42 1630.86,2734.42 ccw(c1630.86,2742.17) 1630.86,2749.92 1611.32,2749.92 cw(c1611.32,2757.67) 1611.32,2765.42 1630.86,2765.42 ccw(c1630.86,2773.17) 1630.86,2780.92 1603.61,2780.92 cw(c1603.61,2788.67) 1603.61,2796.42 1632.75,2796.42 ccw(c1632.75,2804.17) 1632.75,2811.92 1594.55,2811.92 cw(c1594.55,2819.67) 1594.55,2827.42 1663.68,2827.42 ccw(c1663.68,2835.17) 1663.68,2842.92 1620.31,2842.92 cw(c1620.31,2850.67) 1612.56,2850.67 1612.56,2899.07 cw(c1620.31,2899.07) 1620.31,2906.82 1621.2,2906.82 ccw(c1621.2,2914.57) 1621.2,2922.32 1596.17,2922.32 cw(c1596.17,2930.07) 1596.17,2937.82 1621.2,2937.82 ccw(c1621.2,2945.57) 1621.2,2953.32 1596.17,2953.32 cw(c1596.17,2961.07) 1596.17,2968.82 1621.2,2968.82 ccw(c1621.2,2976.57) 1621.2,2984.32 1620.31,2984.32 cw(c1620.31,2992.07) 1612.56,2992.07 1612.56,3011.97 1627.7,3027.12 1650.27,3027.12 1677.55,3054.4 1703.95,3054.4 v1@1720.59,3071.04
  other v1: 1721.67,3072.42
NetR1311_1: R1311.1 U1200.T3 | length 1307.6
  SIG1 w4: U1200.T3@2177.53,2290.85 2183.07,2290.85 2199.37,2274.55 2226.54,2274.55 2387.39,2113.71 2387.39,2091.53 2395.31,2083.6 v1(2411.74,2083.6)
  SIG1 w5.5: R1311.1@1589.69,1746.28 1607.41,1764 2110.59,1764
  SIG1 w6: 2110.59,1764 v1(2299.71,1953.12)
  SIG3 w4: v1(2299.71,1953.12) 2330.29,1983.7
  SIG3 w4.5: 2330.29,1983.7 2411.74,2065.15 v1@2411.74,2085.6
NetR1312_1: R1312.1 U1200.G14 | length 222.4
  SIG1 w6: v2(1878.32,2653.05) U1200.G14@1894.07,2637.3
  SIG3 w5.5: v2(1821.02,2820.56) 1810.28,2809.81 1810.28,2742.48 1862.57,2690.18 1862.57,2668.8 v2(1878.32,2653.05)
NetR1313_1: R1313.1 U1200.A3 | length 210.9
  SIG1 w5: R1313.1@1589.45,2335.11 1590.49,2335.11 1634.75,2290.85 1647.81,2290.85 1649.81,2290.85 ccw(c1649.81,2296.85) 1655.81,2296.85 1655.81,2302.84 cw(c1661.81,2302.84) 1667.81,2302.84 1667.81,2268.66 ccw(c1673.81,2268.66) 1679.81,2268.66 1679.81,2284.85 cw(c1685.81,2284.85) 1685.81,2290.85 U1200.A3@1705.09,2290.85
NetR1314_1: R1314.1 U1200.A2 | length 187.8
  SIG1 w5: R1314.1@1589.45,2270.87 1608.29,2252.03 1608.29,2217.37 1622.86,2202.8 1648.98,2202.8 1705.09,2258.91 U1200.A2@1705.09,2259.35
NetR1315_1: R1315.1 U1200.R5 | length 1531.6
  SIG1 w4: U1200.R5@2146.04,2353.84 2161.31,2369.11 2161.31,2392.72 2170.98,2402.39 2211.83,2402.39 2390.47,2223.75 2419.47,2223.75 2426.42,2216.8 2426.42,2201.08 2433.63,2193.87 2448.95,2193.87 2455.78,2187.03 2455.78,2127.12 v1@2440.05,2111.39 ; 2300.5,1933.6 v1(2330.27,1963.37)
  SIG1 w6: R1315.1@1634.4,1746.28 1635.12,1746.28 1670.95,1710.45 1743.59,1710.45 1781.35,1748.21 2115.11,1748.21 2300.5,1933.6
  SIG3 w4.5: v1(2330.27,1963.37) 2426.38,2059.48 2426.38,2094.72 v1(2441.05,2109.39)
NetR1316_1: R1316.1 U1200.B3 | length 458.9
  SIG1 w4: R1316.1@1589.74,2399.35 1602.98,2386.1 1604.4,2384.68 ccw(c1608.64,2388.93) 1612.88,2384.68 1617.85,2389.65 cw(c1622.09,2385.41) 1626.34,2389.65 cw(c1622.09,2385.41) 1626.34,2381.17 1610.01,2364.84 ccw(c1614.26,2360.6) 1618.5,2356.36 1627.73,2365.59 cw(c1631.97,2361.35) 1636.21,2365.59 cw(c1631.97,2361.35) 1636.21,2357.1 1612.46,2333.35 ccw(c1616.7,2329.1) 1612.46,2324.86 ccw(c1616.7,2329.1) 1620.94,2324.86 1647.88,2351.8 cw(c1652.12,2347.55) 1656.36,2351.8 cw(c1652.12,2347.55) 1656.36,2343.31 1649.9,2336.85 ccw(c1654.26,2332.48) 1649.9,2328.12 ccw(c1654.02,2332.24) 1658.14,2328.12 1668.49,2338.47 cw(c1672.74,2334.23) 1676.98,2338.47 cw(c1672.74,2334.23) 1676.98,2329.99 1672.28,2325.29 ccw(c1676.52,2321.04) 1672.28,2316.8 1681.13,2307.95 1685,2304.09 1735.77,2304.09 1747.7,2316.02 1757.13,2316.02 1762.23,2310.92 1762.23,2302.82 1748.86,2289.45 1737.98,2289.45 U1200.B3@1736.59,2290.85
NetR1317_1: R1317.1 U1200.U16 | length 271
  SIG1 w4: R1317.1@2105.62,2820.56 2114.45,2811.73 2123.64,2802.54 2140.38,2802.54 2149.19,2793.73 2167.65,2793.73 2173.82,2787.56 2189.75,2787.56 2199.08,2778.23 2223.44,2778.23 2256.36,2745.31 2256.36,2709.11 2245.21,2697.96 2211.36,2697.96 U1200.U16@2209.03,2700.29
NetR1318_1: R1318.1 U1200.F15 | length 513.2
  SIG1 w6: v2(1846.82,2684.55) U1200.F15@1862.57,2668.8
  SIG3 w5.5: v2(1789.4,2820.56) 1773.47,2804.63 ccw(c1785.11,2792.99) 1768.65,2792.99 1768.65,2756.07 cw(c1744.13,2756.07) 1744.13,2731.55 1697.03,2731.55 ccw(c1697.03,2717.94) 1683.41,2717.94 1683.41,2692.74 ccw(c1691.64,2692.72) 1699.86,2692.74 1699.86,2705.67 cw(c1708.36,2705.97) 1716.85,2705.96 1716.85,2686.58 ccw(c1724.58,2686.55) 1732.3,2686.58 1732.3,2694.39 cw(c1739.11,2694.39) 1739.11,2701.19 1773.31,2701.19 ccw(c1773.31,2712.38) 1784.5,2712.38 1784.5,2723.83 cw(c1792.25,2723.83) 1800,2723.83 1800,2712.28 ccw(c1808.67,2712.28) 1808.67,2703.61 1822.99,2703.61 cw(c1822.99,2692.11) 1831.13,2700.24 v2(1846.82,2684.55)
NetR1319_1: R1319.1 U1200.D15 | length 337.7
  SIG1 w6: v2(1783.83,2684.55) U1200.D15@1799.58,2668.8
  SIG3 w5.5: v2(1726.16,2820.56) 1726.16,2789.07 1705.48,2768.39 1673.61,2768.39 1665.21,2759.99 1665.21,2681.96 1681.18,2665.99 1765.28,2665.99 v2(1783.83,2684.55)
NetR1320_1: R1320.1 U1200.T17 | length 789.1
  SIG1 w4: 1961.18,2797.07 1961.18,2758.59 cw(c1955.18,2758.59) 1949.18,2758.59 1949.18,2797.31 ccw(c1942.57,2797.31) 1943.88,2803.79 1942.48,2803.79 ccw(c1943.79,2797.31) 1937.18,2797.31 1937.18,2759.01 cw(c1931.18,2759.01) 1925.18,2759.01 1925.18,2797.4 ccw(c1919.18,2797.4) 1919.18,2803.4 1898.9,2803.4 ccw(c1898.9,2797.74) 1898.9,2792.08 1909.26,2792.08 cw(c1909.26,2786.08) 1909.26,2780.08 1898.75,2780.08 ccw(c1898.75,2774.08) 1898.75,2768.08 1910.58,2768.08 cw(c1910.58,2764.05) 1914.61,2763.79 1914.61,2748.37 1919.74,2743.24 1932.4,2743.24 1938.65,2737 1944.78,2737 1951.19,2743.4 1962.18,2743.4 1968.59,2737 1976.2,2737 1982.84,2743.64 1993.53,2743.64 2000.17,2737 2008.23,2737 2019.46,2748.22 2019.46,2774.27 cw(c2024.41,2774.27) 2024.41,2779.22 2043.39,2779.22 2050.58,2772.03 2054.28,2772.03 2061.53,2779.28 2072.66,2779.28 2090.73,2761.22 2101.29,2761.22 2110.05,2769.97 2142.6,2769.97 2177.53,2735.04 U1200.T17@2177.53,2731.79 ; 1961.18,2798.07 cw(c1966.52,2798.07) 1966.52,2803.4 2025.22,2803.4 R1320.1@2042.38,2820.56
NetR1321_1: R1321.1 U1200.A10 | length 122.4
  SIG1 w4: R1321.1@1589.45,2517.08 1594.76,2522.39 1668.27,2522.39 1679.34,2511.32 U1200.A10@1705.09,2511.32
NetR1322_1: R1322.1 U1200.E2 | length 263.5
  SIG1 w6: v2(1815.33,2243.6) U1200.E2@1831.08,2259.35
  SIG6 w4: 1656.47,2224.97 1703.66,2224.97 1707.76,2229.07 1800.8,2229.07 v2(1815.33,2243.6)
  SIG6 w6: v1(1589.45,2206.64) 1638.13,2206.64 1656.47,2224.97
NetR1323_1: R1323.1 U1200.D14 | length 490.9
  SIG1 w6: R1323.1@1404.21,2683.64 1427.17,2706.6 v2@1427.17,2746.94 ; v2(1783.83,2653.05) U1200.D14@1799.58,2637.3
  SIG6 w4: 1623.08,2742.77 1712.8,2653.05 v2(1783.83,2653.05)
  SIG6 w5: v2(1426.93,2746.94) 1431.06,2742.77 1623.08,2742.77
NetR1324_1: R1324.1 U1200.T16 | length 1011.1
  SIG1 w4: R1324.1@2074,2820.56 2074,2820.14 2056.3,2802.44 2035.69,2802.44 2028.83,2795.58 1980.78,2795.58 ccw(c1980.78,2788.43) 1973.62,2788.43 1973.62,2757.25 ccw(c1979.62,2757.25) 1985.62,2757.25 1985.62,2781 cw(c1991.62,2780.98) 1997.62,2781 1997.62,2754.42 ccw(c2003.6,2754.47) 2009.58,2754.42 2009.58,2781.09 cw(c2015.32,2781.09) 2015.32,2786.83 2075.57,2786.83 ccw(c2075.57,2791.04) 2079.78,2791.04 2079.78,2797.3 cw(c2085.29,2797.3) 2090.79,2797.3 2090.79,2774.72 ccw(c2095.93,2774.7) 2101.08,2774.72 2101.08,2797.3 cw(c2107.08,2797.3) 2113.08,2797.3 2113.08,2784.1 ccw(c2119.08,2784.1) 2125.08,2784.1 ; 2125.08,2785.36 2125.08,2784.1 ; U1200.T16@2177.3,2700.53 2164.19,2700.53 2159.93,2704.79 2159.93,2712.58 2166.88,2719.52 2176.42,2719.52 2185.31,2710.64 2201.27,2710.64 ccw(c2201.27,2716.15) 2201.27,2721.65 2193.67,2721.65 cw(c2193.67,2725.03) 2190.29,2725.03 2190.29,2732.18 2211.63,2753.52 cw(c2215.85,2749.31) 2220.06,2753.52 2236,2737.58 2236,2722.8 2230.82,2717.62 2222.54,2717.62 ccw(c2222.54,2712.11) 2222.54,2706.61 2237.36,2706.61 2247.25,2716.5 2247.25,2740.86 2222.48,2765.63 ccw(c2214.63,2757.78) 2206.77,2765.63 2186.78,2745.64 cw(c2182.54,2749.88) 2178.29,2754.13 2191.03,2766.86 ccw(c2186.79,2771.1) 2182.54,2775.35 2170.65,2763.45 cw(c2166.87,2767.24) 2163.09,2763.45 cw(c2167.33,2767.7) 2163.09,2771.94 2165.34,2774.19 ccw(c2161.1,2778.44) 2156.85,2782.68 2152.28,2778.1 2143.08,2778.1 cw(c2143.08,2784.1) 2137.08,2784.1 2137.08,2787.29 ccw(c2131.08,2787.29) 2125.08,2787.29 2125.08,2784.1
NetR1325_1: R1325.1 U1200.F3 | length 316.8
  SIG1 w6: v2(1846.82,2275.1) U1200.F3@1862.57,2290.85
  SIG6 w4: 1626.55,2290.31 1626.55,2290.85 1831.08,2290.85 v2(1846.82,2275.1)
  SIG6 w6: v1(1589.45,2238.76) 1589.45,2253.74 1626.01,2290.31 1626.55,2290.31
NetR1326_1: R1326.1 U1200.E17 | length 23.8
  SIG1 w6: v2@1825.17,2752.62 1824.55,2752 1824.55,2738.32 U1200.E17@1831.08,2731.79
  other v2: 1824.67,2752.62
NetR1327_1: R1327.1 U1200.E16 | length 162.3
  SIG1 w4: R1327.1@1757.78,2820.56 1767.9,2810.44 1767.9,2780.23 1778.41,2769.72 1798.34,2769.72 1811.06,2757 1811.06,2720.31 U1200.E16@1831.08,2700.29
NetR1328_1: R1328.1 U1200.C15 | length 219.5
  SIG1 w6: v2(1752.34,2684.55) U1200.C15@1768.08,2668.8
  SIG6 w6: v2(1589.45,2767.36) 1634.73,2767.36 1717.54,2684.55 v2(1752.34,2684.55)
NetR1329_1: R1329.1 U1200.P16 | length 601.6
  SIG1 w6: U1200.P16@2114.54,2700.29 v2(2130.29,2716.04)
  SIG6 w4: v2(2130.29,2716.04) 2141.01,2716.04 ccw(c2141.01,2722.04) 2147.01,2722.04 2147.01,2723.08 cw(c2153.01,2723.08) 2159.01,2723.08 2159.01,2708.72 ccw(c2165.01,2708.72) 2171.01,2708.72 2171.01,2744.25 cw(c2177.01,2744.25) 2183.01,2744.25 2183.01,2714.02 ccw(c2189.01,2714.02) 2195.01,2714.02 2195.01,2744.25 cw(c2201.01,2744.25) 2207.01,2744.25 2207.01,2715.84 ccw(c2214.83,2715.84) 2214.83,2708.02 2229.42,2708.02 ccw(c2229.42,2715.4) 2236.8,2715.4 2236.8,2741.74 cw(c2243.33,2741.74) 2249.85,2741.8 2249.85,2714.02 ccw(c2255.32,2714) 2260.79,2714.02 2260.79,2742.95 cw(c2266.67,2742.92) 2272.55,2742.95 2272.55,2714.02 ccw(c2278.39,2714) 2284.24,2714.02 2284.24,2742.95 cw(c2290.03,2742.92) 2295.83,2742.95 2295.83,2733.14 ccw(c2301.83,2733.14) 2307.83,2733.14 2307.83,2737.95 cw(c2313.83,2737.95) 2313.83,2743.95 v2(2324.05,2743.95)
NetR1330_1: R1330.1 U1200.D8 | length 1959.4
  SIG1 w5.5: R1330.1@1284.2,2170.49 1297.99,2170.49 1333.13,2205.64 1333.13,2264.83 1343.25,2274.95 1382.32,2274.95 1394.48,2262.79 1394.48,2215.28 cw(c1388.48,2215.28) 1388.48,2209.28 1381.27,2209.28 ccw(c1381.27,2203.28) 1381.27,2197.28 1388.48,2197.28 cw(c1388.48,2191.28) 1394.48,2191.28 1394.48,2177.96 1403.63,2168.81 1439.61,2168.81 ccw(c1439.61,2174.81) 1439.61,2180.81 1412.34,2180.81 cw(c1412.34,2186.81) 1412.34,2192.81 1444.86,2192.81 ccw(c1444.86,2198.81) 1444.86,2204.81 1412.34,2204.81 cw(c1412.34,2210.81) 1412.34,2216.81 1448.16,2216.81 ccw(c1448.16,2222.81) 1448.16,2228.81 1438.24,2228.81 cw(c1438.24,2234.81) 1432.24,2234.81 ; v2(1383.36,2522.53) 1383.42,2522.48 1383.42,2510.12 cw(c1377.42,2510.12) 1377.42,2504.12 1344.1,2504.12 ccw(c1344.1,2498.12) 1344.1,2492.12 1377.42,2492.12 cw(c1377.42,2486.12) 1383.42,2486.12 ccw(c1389.42,2486.12) 1389.42,2480.12 1403.54,2480.12 cw(c1403.54,2474.12) 1403.54,2468.12 1387.88,2468.12 ccw(c1387.88,2462.12) 1387.88,2456.12 1402.32,2456.12 cw(c1402.32,2450.12) 1402.32,2444.12 1389.42,2444.12 ccw(c1389.42,2438.12) 1383.42,2438.12 1383.42,2332.07 ccw(c1389.83,2332.07) 1396.24,2332.07 1396.24,2358.77 cw(c1402.24,2358.77) 1408.24,2358.77 1408.24,2332.07 ccw(c1414.24,2332.07) 1414.24,2326.07 ccw(c1414.24,2332.07) 1420.24,2332.07 1420.24,2376.22 cw(c1426.24,2376.22) 1432.24,2376.22 1432.24,2320.73 cw(c1426.24,2320.73) 1426.24,2314.73 1414.24,2314.73 ccw(c1414.24,2306.57) 1406.08,2306.57 1406.08,2239.77 ccw(c1412.76,2239.77) 1419.45,2239.77 1419.45,2294.36 cw(c1425.62,2294.36) 1431.79,2294.36 1431.79,2258.48 ccw(c1438.01,2258.48) 1444.24,2258.48 1444.24,2265.61 cw(c1450.24,2265.61) 1456.24,2265.61 1456.24,2246.48 cw(c1450.24,2246.48) 1450.24,2240.48 1438.24,2240.48 ccw(c1438.24,2234.48) 1432.24,2234.48
  SIG1 w6: v2(1783.83,2464.07) 1784.35,2464.07 1799.58,2448.85 U1200.D8@1799.58,2448.33
  SIG3 w5.5: v2@1626.3,2504.1 1651.77,2478.63 1769.28,2478.63 v2(1783.83,2464.07)
  SIG6 w5: v2(1383.36,2522.53) 1428.37,2522.53 1449.88,2501.02 1621.88,2501.02 v2(1626.06,2505.2)
NetR1331_1: R1331.1 U1200.P15 | length 576.9
  SIG1 w6: U1200.P15@2114.54,2668.8 v2(2130.29,2684.55)
  SIG6 w5.5: v2(2130.29,2684.55) 2121.39,2684.55 2107.98,2671.14 2094.55,2671.14 cw(c2094.55,2679.69) 2086,2679.69 2086,2696.01 ccw(c2078.84,2696.01) 2078.84,2703.17 2067.69,2703.17 ccw(c2067.69,2693.37) 2057.89,2693.37 2057.89,2677.38 ccw(c2063.89,2677.38) 2063.89,2671.38 2075.02,2671.38 cw(c2074.99,2665.25) 2075.02,2659.11 2064.03,2659.11 ccw(c2063.99,2653.15) 2064.03,2647.19 2103.71,2647.19 2124.97,2668.45 2237.72,2668.45 ccw(c2237.72,2674.69) 2243.18,2677.68 2241.03,2681.61 cw(c2247.18,2684.97) 2243.82,2691.12 2245.23,2691.12 cw(c2245.23,2683.91) 2251.56,2687.37 2263.28,2665.95 ccw(c2268.53,2668.86) 2273.81,2671.71 2267.66,2682.95 cw(c2272.92,2685.83) 2278.19,2688.71 2282.39,2681.02 ccw(c2287.65,2683.9) 2291.9,2679.66 v2(2324.05,2711.82)
NetR1332_1: R1332.1 U1200.D6 | length 1048.6
  SIG1 w6: v2(1783.83,2401.08) U1200.D6@1799.58,2385.33
  SIG3 w4.5: 1530.44,2439.35 1538.64,2431.15 1753.77,2431.15 v2(1783.83,2401.08)
  SIG3 w5.5: 1530.44,2439.35 1530.44,2552.77 1578.69,2601.03 1578.69,2679.58 1573.29,2684.98 1573.29,2790.41 ccw(c1567.2,2790.41) 1566.55,2796.47 cw(c1566.55,2804.22) 1566.55,2811.97 1568.53,2811.97 ccw(c1568.53,2819.72) 1568.53,2827.47 1566.55,2827.47 cw(c1566.55,2835.22) 1566.55,2842.97 1568.53,2842.97 ccw(c1568.53,2850.72) 1568.53,2858.47 1566.55,2858.47 cw(c1566.55,2866.22) 1566.55,2873.97 1568.53,2873.97 ccw(c1568.53,2881.72) 1568.53,2889.47 1566.55,2889.47 cw(c1566.55,2897.22) 1566.55,2904.97 1567.39,2904.97 ccw(c1567.39,2912.72) 1575.14,2912.72 1575.14,3074.83 v1(1586.51,3086.2)
NetR1333_1: R1333.1 U1200.C4 | length 241.4
  SIG1 w6: U1200.C4@1768.08,2322.34 v2(1783.83,2338.09)
  SIG6 w4: v1(1589.74,2367.05) 1614.2,2367.05 1647.93,2333.32 1725.61,2333.32 1736.59,2322.34 1768.08,2322.34 v2(1783.83,2338.09)
NetR1334_1: R1334.1 U1200.N2 | length 269.4
  SIG1 w6: U1200.N2@2083.05,2259.35 2098.79,2243.6 2119.4,2243.6 2131.14,2231.86 2131.14,2217.01 2136.99,2211.16 2138.4,2209.75 ccw(c2142.64,2213.99) 2146.89,2209.75 2151.5,2214.36 cw(c2155.74,2210.12) 2159.98,2214.36 cw(c2155.74,2210.12) 2159.98,2205.87 2155.37,2201.26 ccw(c2159.61,2197.02) 2155.37,2192.78 2163.86,2184.29 cw(c2159.61,2180.05) 2163.86,2175.81 2154.46,2166.42 ccw(c2158.71,2162.17) 2154.46,2157.93 ccw(c2158.71,2162.17) 2162.95,2157.93 2172.34,2167.32 cw(c2177.63,2162.04) 2182.91,2167.32 2206.57,2143.66 2206.57,2134.09 R1334.1@2215.38,2125.28
NetR1335_1: R1335.1 U1200.B4 | length 1729.9
  SIG1 w4: v2@1564.39,2445.98 1580.37,2430 1617.04,2430 1647.86,2399.18 1662.38,2399.18 1672.06,2389.5 1672.06,2367.29 1701.12,2338.23 1720.7,2338.23 U1200.B4@1736.59,2322.34
  SIG3 w4.5: v2(1567.51,2445.06) 1581.68,2459.23 1581.68,2534.26 cw(c1587.68,2534.26) 1587.68,2540.26 cw(c1587.68,2534.26) 1593.68,2534.26 1593.68,2477.97 ccw(c1599.68,2477.97) 1599.68,2471.97 1623.68,2471.97 ccw(c1623.68,2477.97) 1623.68,2483.97 1611.68,2483.97 cw(c1611.68,2489.97) 1605.68,2489.97 1605.68,2534.92 cw(c1611.68,2534.92) 1617.68,2534.92 1617.68,2524.91 ccw(c1623.68,2524.91) 1629.68,2524.91 1629.68,2534.79 cw(c1635.68,2534.79) 1641.68,2534.79 1641.68,2513.97 ccw(c1647.68,2513.97) 1647.68,2507.97 1659.68,2507.97 cw(c1659.68,2501.97) 1665.68,2501.97 1665.68,2493.42 ccw(c1671.59,2493.42) 1671.59,2487.51 ccw(c1671.59,2493.6) 1677.68,2493.6 1677.68,2513.97 ccw(c1671.68,2513.97) 1671.68,2519.97 1659.68,2519.97 cw(c1659.68,2525.97) 1653.68,2525.97 1653.68,2546.26 ccw(c1647.68,2546.26) 1647.68,2552.26 1587.68,2552.26 cw(c1587.68,2558.26) 1581.68,2558.26 1581.68,2567.8 1601.73,2587.85 1601.73,2623.72 1630.9,2652.89 cw(c1634.95,2648.82) 1639.02,2644.78 1626.74,2632.51 ccw(c1631.01,2628.29) 1635.23,2624.02 1647.5,2636.3 cw(c1651.73,2632.04) 1655.99,2627.81 1642.19,2614.02 ccw(c1646.43,2609.77) 1650.68,2605.53 1664.47,2619.33 cw(c1668.7,2615.07) 1672.94,2619.31 cw(c1668.7,2615.06) 1672.95,2610.84 1669.9,2607.78 ccw(c1674.12,2603.52) 1678.34,2599.25 1698.41,2619.33 cw(c1702.63,2615.06) 1706.9,2610.84 1697.97,2601.91 ccw(c1702.21,2597.67) 1706.46,2593.43 1716.76,2603.73 cw(c1720.98,2599.47) 1725.21,2603.73 1733.3,2595.64 1756.24,2595.64 ccw(c1756.24,2601.64) 1756.24,2607.64 1737.35,2607.64 1716.55,2628.44 cw(c1721.09,2632.95) 1716.54,2637.46 1717.37,2638.28 ccw(c1713.11,2642.51) 1719.11,2642.51 1719.11,2650.85 ccw(c1713.11,2650.85) 1707.11,2650.85 1707.11,2647.48 cw(c1701.11,2647.48) 1705.37,2643.26 1689.89,2627.77 cw(c1685.67,2632.04) 1681.44,2627.77 1647.11,2662.11 1647.11,2791.08 1722.26,2866.24 v1@1722.26,2889.49
  other v1: 1722.26,2890.49
NetR1336_1: R1336.1 U1200.P2 | length 299.2
  SIG1 w4: U1200.P2@2114.54,2259.35 2125.93,2259.35 2140.53,2244.75 2157.16,2244.75 2161.95,2239.96 2161.95,2225.46 2223.82,2163.59 ccw(c2228.54,2168.31) 2233.26,2163.59 2243.71,2174.04 cw(c2247.95,2169.8) 2252.19,2165.56 2242.43,2155.79 ccw(c2246.67,2151.55) 2242.43,2147.3 ccw(c2246.67,2151.55) 2250.91,2147.3 2261.37,2157.76 cw(c2265.61,2153.51) 2269.85,2149.27 2266.86,2146.28 ccw(c2271.1,2142.03) 2266.86,2137.79 R1336.1@2279.37,2125.28
NetR1337_1: R1337.1 U1200.C3 | length 284
  SIG1 w5: R1337.1@1589.45,2302.99 1604.25,2302.99 1621.24,2286 1621.24,2222.07 1628.32,2214.99 1641.96,2214.99 1702.44,2275.46 1752.7,2275.46 U1200.C3@1768.08,2290.85
NetR1338_1: R1338.1 U1200.C6 | length 2453
  SIG1 w6: U1200.C6@1768.08,2385.33 v2(1783.83,2369.59) ; R1338.1@2410.3,2004.07 2430.14,1984.23 cw(c2425.08,1979.18) 2425.08,1972.02 2401.99,1972.03 ccw(c2401.99,1964.03) 2401.99,1956.03 2430.23,1956.03 cw(c2430.23,1948.03) 2438.23,1948.03 v1(2438.23,1921.4)
  SIG3 w5.5: v2(1783.83,2369.59) 1802.01,2387.77 1819.48,2387.77 1830.94,2376.31 1830.94,2330.2 1822.5,2321.76 1778.41,2321.76 1766.95,2333.22 1766.95,2346.31 1759.4,2353.86 1705.83,2353.86 1694.69,2342.72 1648.54,2342.72 1637.42,2353.84 1637.42,2372.06 ccw(c1629.67,2372.06) 1629.67,2379.81 1606.7,2379.81 cw(c1606.7,2387.56) 1606.7,2395.31 1629.67,2395.31 ccw(c1629.67,2403.06) 1637.42,2403.06 1637.42,2408.63 1628.41,2417.64 1541.79,2417.64 1533.7,2409.55 1533.7,2403.37 ccw(c1541.45,2403.37) 1541.45,2395.62 1573.28,2395.62 cw(c1573.28,2387.87) 1573.28,2380.12 1541.49,2380.12 ccw(c1541.49,2372.37) 1541.49,2364.62 1564.88,2364.62 cw(c1564.88,2356.87) 1564.88,2349.12 1541.45,2349.12 ccw(c1541.45,2341.37) 1533.7,2341.37 1533.7,2321.04 1441.17,2228.5 1441.17,1989.4 1552.68,1877.89 2197.2,1877.89 2237.14,1837.95 2371.07,1837.95 2438.23,1905.1 v1(2438.23,1921.4)
NetR1339_1: R1339.1 U1200.D3 | length 96.8
  SIG1 w6: U1200.D3@1799.58,2290.85 v2(1815.33,2275.1)
  SIG6 w6: v2(1815.33,2275.1) 1831.08,2259.35 1831.08,2214.29 R1339.1@1825.98,2209.19
NetR1340_1: R1340.1 U1200.D2 | length 127.5
  SIG1 w6: v2(1783.83,2275.1) U1200.D2@1799.58,2259.35
  SIG6 w4: v2@1782.92,2274.19 v2(1783.83,2275.1)
  SIG6 w6: R1340.1@1678.99,2274.19 v2@1782.92,2274.19
NetR1341_1: R1341.1 U1200.T11 | length 399.9
  SIG1 w4: R1341.1@2168.87,2820.56 2169.63,2820.56 2186.61,2803.59 2202.7,2803.59 2211.73,2794.56 2235.54,2794.56 2242.09,2788.01 2242.09,2782.26 2257.55,2766.79 2262.56,2766.79 2275.23,2754.12 2275.23,2699.09 ; U1200.T11@2177.53,2542.81 2197.1,2562.38 2215.71,2562.38 2231.38,2578.06
  SIG1 w5: 2231.38,2578.06 2231.38,2655.24 2275.23,2699.09
NetR1342_1: R1342.1 U1200.D1 | length 140.2
  SIG1 w6: v2@1785.44,2241.99 U1200.D1@1799.58,2227.85
  SIG6 w6: R1342.1@1679.12,2242.35 1696.12,2259.35 1768.83,2259.35 v2(1785.44,2242.74)
NetR1343_1: R1343.1 U1200.U13 | length 325.7
  SIG1 w4: R1343.1@2137.24,2820.56 2154.44,2803.36 2170.69,2803.36 2178.14,2795.92 2194.35,2795.92 2204.37,2785.9 2226.88,2785.9 2254.48,2758.3 2258.13,2758.3 2265.66,2750.77 2265.66,2705.12
  SIG1 w5: U1200.U13@2209.03,2605.81 2221.43,2618.2 2221.43,2660.89 2265.66,2705.12
NetR1344_1: R1344.1 U1200.E5 | length 169.3
  SIG1 w6: v2(1815.33,2338.09) U1200.E5@1831.08,2353.84
  SIG6 w6: R1344.1@1679.38,2315.73 1681.61,2313.5 1790.74,2313.5 v2(1815.33,2338.09)
NetR1345_1: R1345.1 U1200.T13 | length 722.3
  SIG1 w4: v2@2161.79,2621.07 v2@2161.79,2621.55 ; U1200.T13@2177.04,2605.81 U1200.T13@2177.53,2605.81
  SIG1 w6: v2@2161.79,2621.07 U1200.T13@2177.04,2605.81
  SIG3 w5: v2(1979.13,2820.56) 1986.94,2812.76 1996.04,2803.66 2006.94,2803.66 cw(c2006.94,2797.66) 2012.94,2797.66 2012.94,2783.86 ccw(c2018.94,2783.86) 2024.94,2783.86 2024.94,2810.3 cw(c2030.94,2810.3) 2036.94,2810.3 2036.94,2785.36 ccw(c2042.94,2785.36) 2048.94,2785.36 2048.94,2810.64 cw(c2054.94,2810.64) 2060.94,2810.64 2060.94,2786.52 ccw(c2066.94,2786.52) 2072.94,2786.52 2072.94,2810.54 cw(c2078.94,2810.54) 2084.94,2810.54 2084.94,2766.41 ccw(c2090.94,2766.41) 2096.94,2766.41 2096.94,2793.87 cw(c2102.94,2793.87) 2108.94,2793.87 2108.94,2762.39 ccw(c2114.94,2762.39) 2120.94,2762.39 cw(c2127.05,2762.43) 2131.37,2766.75 2146.08,2752.04 2146.08,2749.78 ccw(c2152.08,2749.78) 2152.08,2743.78 2159.21,2743.78 cw(c2159.21,2737.78) 2159.21,2731.78 2147.76,2731.78 ccw(c2147.76,2725.78) 2147.76,2719.78 2162.72,2719.78 cw(c2162.72,2713.78) 2162.72,2707.78 2152.08,2707.78 ccw(c2152.08,2701.78) 2146.08,2701.78 2146.08,2636.65 2161.17,2621.55 v2@2161.79,2621.55
  other v2: 2161.79,2622.55